# Altium PCB NixieClock.PcbDoc
Units mm, origin at the board's own origin, x right, y up, seen from the top; angles counter-clockwise.
Board outline 100 x 100 mm, 2 copper layers (Top Layer, Bottom Layer); 100 components, 82 nets, 362 pads, 0 vias.
Unrouted connection lines stored in the file: 208.
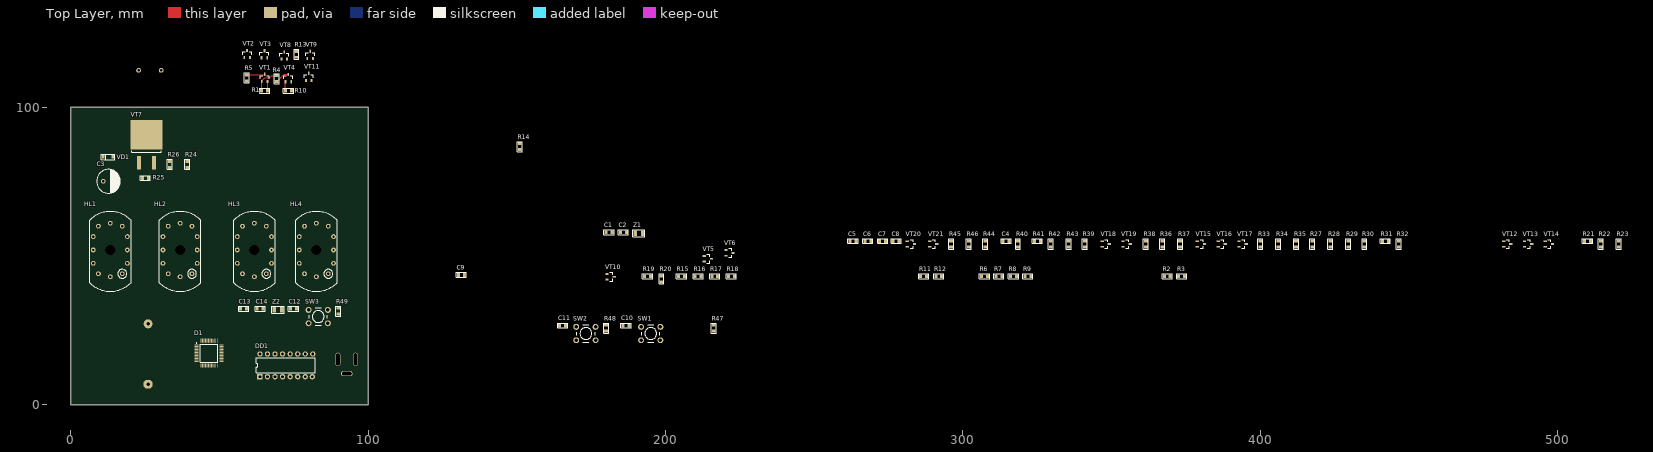
[diagram p0: Top Layer view]
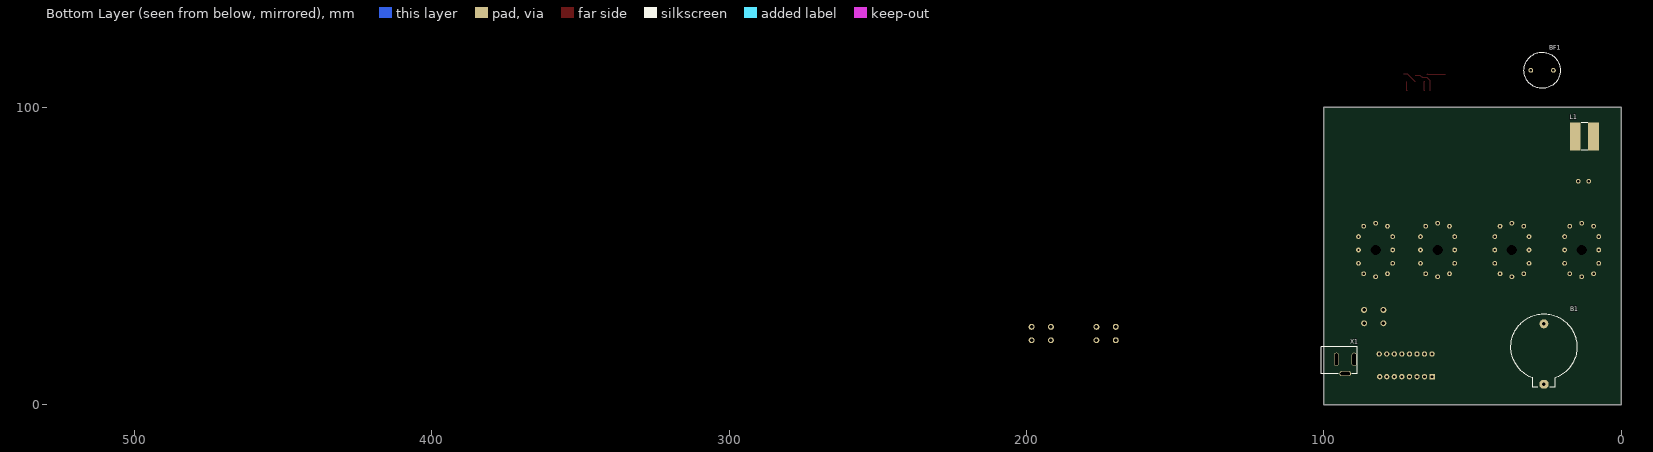
[diagram p1: Bottom Layer view, seen from below]

## Layer stack, top to bottom
Top Solder: solder mask 0.0102, Solder Resist, Dk 3.5
Top Layer: signal copper 0.0356
Dielectric 1: dielectric 0.32, FR-4, Dk 4.8
Bottom Layer: signal copper 0.0356
Bottom Solder: solder mask 0.0102, Solder Resist, Dk 3.5

## Board outline
0,0 0,100 100,100 100,0

## Design rules (kind name [scope] priority, off if disabled: settings)
Clearance [All] p1: gap=0.254 ignorepadtopadclearanceinfootprint=FALSE except(0: Arc-Hole Track-Hole SMDPad-Hole THPad-Hole Via-Hole Fill-Hole Poly-Hole Region-Hole Text-Hole)
PolygonConnect [All] p1: connectstyle=Relief reliefconductorwidth=0.254 reliefentries=4 polygonreliefangle="90 Angle" airgapwidth=0.254
RoutingVias [All] p1: holewidth=0.711 width=1.27 viastyle="Through Hole" minholewidth=0.711 minwidth=1.27 maxholewidth=0.711 maxwidth=1.27
SolderMaskExpansion [All] p1: expansion=0.102 istentingtop=FALSE
Width [All] p1: maxlimit=5 minlimit=0.254 preferedwidth=0.254 minimp=50.000000 maximp=50.000000 favimp=50.000000
30 further rules are at their usual default settings.

## Classes and differential pairs
component class NixieClock: B1 BF1 C1 C2 C3 C4 C5 C6 C7 C8 C9 C10 C11 C12 C13 C14 D1 DD1 HL1 HL2 HL3 HL4 L1 R21 R22 R23 R24 R25 R26 R27 R28 R29 R30 R31 R32 R33 R34 R35 R36 R37 R38 R39 R40 R41 R42 R43 R44 R45 R46 R47 R48 R49 SW1 SW2 SW3 VD1 VT7 VT12 VT13 VT14 VT15 VT16 VT17 VT18 VT19 VT20 VT21 X1 Z1 Z2
component class Clock: R1 R2 R3 R4 R5 R6 R7 R8 R9 R10 R11 R12 R13 R14 R15 R16 R17 R18 R19 R20 VT1 VT2 VT3 VT4 VT5 VT6 VT8 VT9 VT10 VT11

## Components (designator, comment, footprint, x,y, rotation, side; value= is the part's Value field where it differs from the comment)
B1 "Single battery CR2032" "BAT: CH224-2032" 26,17 r90 bottom
BF1 "DIP switch, 2.73 kHz, 3VDC, 80mA, -20...+70°C" "BUZ: AI-1223-TWT-3V-2-R" 26.6,112.4 r180 bottom
C1 "Ceramic capacitor, 12p, X7R, ±10%, 16V, 0805, -55...+125°C" "CAP: 0805" 180.975,57.912 r0 top value=12p
C2 "Ceramic capacitor, 12p, X7R, ±10%, 16V, 0805, -55...+125°C" "CAP: 0805" 185.801,57.912 r0 top value=12p
C3 "Aluminium capacitor, 4.7μF, 300V, ±20%, 54mOhm, 14x10x5 mm, -55...+105°C" "CAP: D8C3.5H12" 12.7,75.1 r0 top value=4.7μF
C4 "Ceramic capacitor, 0.1μF, X7R, ±10%, 16V, 0805, -55...+125°C" "CAP: 0805" 314.499,55 r0 top value=0.1μF
C5 "Ceramic capacitor, 0.1μF, X7R, ±10%, 16V, 0805, -55...+125°C" "CAP: 0805" 262.999,55 r0 top value=0.1μF
C6 "Ceramic capacitor, 0.1μF, X7R, ±10%, 16V, 0805, -55...+125°C" "CAP: 0805" 267.999,55 r0 top value=0.1μF
C7 "Ceramic capacitor, 0.1μF, X7R, ±10%, 16V, 0805, -55...+125°C" "CAP: 0805" 272.999,55 r0 top value=0.1μF
C8 "Ceramic capacitor, 0.1μF, X7R, ±10%, 16V, 0805, -55...+125°C" "CAP: 0805" 277.499,55 r0 top value=0.1μF
C9 "Ceramic capacitor, 0.1μF, X7R, ±10%, 16V, 0805, -55...+125°C" "CAP: 0805" 131.3,43.6 r0 top value=0.1μF
C10 "Ceramic capacitor, 0.1μF, X7R, ±10%, 16V, 0805, -55...+125°C" "CAP: 0805" 186.7,26.6 r0 top value=0.1μF
C11 "Ceramic capacitor, 0.1μF, X7R, ±10%, 16V, 0805, -55...+125°C" "CAP: 0805" 165.4,26.6 r0 top value=0.1μF
C12 "Ceramic capacitor, 0.1μF, X7R, ±10%, 16V, 0805, -55...+125°C" "CAP: 0805" 74.9,32.3 r0 top value=0.1μF
C13 "Ceramic capacitor, 20p, X7R, ±10%, 16V, 0805, -55...+125°C" "CAP: 0805" 58.1,32.3 r0 top value=20p
C14 "Ceramic capacitor, 20p, X7R, ±10%, 16V, 0805, -55...+125°C" "CAP: 0805" 63.7,32.3 r0 top value=20p
D1 "IC microcontroller, 32-Bit, Cortex-M3, 72MHz, 64KB, 20KB, 2...3.6V, -40...+85°C, 48-LQFP" 48-LQFP 46.5,17.3 r0 top
DD1 "K155ID1" 16-DIP 66.14,13.21 r90 top
HL1 "IN-12" IN-12 13.3,52 r0 top
HL2 "IN-12" IN-12 36.75,52 r0 top
HL3 "IN-12" IN-12 61.75,52 r0 top
HL4 "IN-12" IN-12 82.6,52 r0 top
L1 "Fixed inductor, 220μH, ±10%, SDR0805, 660mA, -40...+125°C" "IND: SDR1006" 12.4,90.2 r180 bottom value=220μH
R1 "Resistor film, 10k, ±5%, 0805, 0.125W, -55...+125°C" "RES: 0805" 65.2,105.6 r0 top value=10k
R2 "Resistor film, 10k, ±5%, 0805, 0.125W, -55...+125°C" "RES: 0805" 368.681,43.18 r0 top value=10k
R3 "Resistor film, 10k, ±5%, 0805, 0.125W, -55...+125°C" "RES: 0805" 373.507,43.18 r0 top value=10k
R4 "Resistor film, 300k, ±5%, 0805, 0.125W, -55...+125°C" "RES: 0805" 69.2,109.6 r90 top value=300k
R5 "Resistor film, 10k, ±5%, 0805, 0.125W, -55...+125°C" "RES: 0805" 59.2,109.85 r90 top value=10k
R6 "Resistor film, 300k, ±5%, 0805, 0.125W, -55...+125°C" "RES: 0805" 307.213,43.18 r0 top value=300k
R7 "Resistor film, 10k, ±5%, 0805, 0.125W, -55...+125°C" "RES: 0805" 312.039,43.18 r0 top value=10k
R8 "Resistor film, 300k, ±5%, 0805, 0.125W, -55...+125°C" "RES: 0805" 316.992,43.18 r0 top value=300k
R9 "Resistor film, 10k, ±5%, 0805, 0.125W, -55...+125°C" "RES: 0805" 321.818,43.18 r0 top value=10k
R10 "Resistor film, 10k, ±5%, 0805, 0.125W, -55...+125°C" "RES: 0805" 73.2,105.6 r180 top value=10k
R11 "Resistor film, 10k, ±5%, 0805, 0.125W, -55...+125°C" "RES: 0805" 286.766,43.18 r0 top value=10k
R12 "Resistor film, 10k, ±5%, 0805, 0.125W, -55...+125°C" "RES: 0805" 291.846,43.18 r0 top value=10k
R13 "Resistor film, 10k, ±5%, 0805, 0.125W, -55...+125°C" "RES: 0805" 75.9,117.8 r90 top value=10k
R14 "Resistor film, 10k, ±5%, 0805, 0.125W, -55...+125°C" "RES: 0805" 151,86.75 r90 top value=10k
R15 "Resistor film, 300k, ±5%, 0805, 0.125W, -55...+125°C" "RES: 0805" 205.359,43.18 r0 top value=300k
R16 "Resistor film, 10k, ±5%, 0805, 0.125W, -55...+125°C" "RES: 0805" 210.947,43.18 r0 top value=10k
R17 "Resistor film, 300k, ±5%, 0805, 0.125W, -55...+125°C" "RES: 0805" 216.535,43.18 r0 top value=300k
R18 "Resistor film, 10k, ±5%, 0805, 0.125W, -55...+125°C" "RES: 0805" 222.123,43.18 r0 top value=10k
R19 "Resistor film, 10k, ±5%, 0805, 0.125W, -55...+125°C" "RES: 0805" 193.929,43.18 r0 top value=10k
R20 "Resistor film, 10k, ±5%, 0805, 0.125W, -55...+125°C" "RES: 0805" 198.628,42.291 r90 top value=10k
R21 "Resistor film, 10k, ±5%, 0805, 0.125W, -55...+125°C" "RES: 0805" 509.999,55 r0 top value=10k
R22 "Resistor film, 10k, ±5%, 0805, 0.125W, -55...+125°C" "RES: 0805" 514.499,54 r90 top value=10k
R23 "Resistor film, 10k, ±5%, 0805, 0.125W, -55...+125°C" "RES: 0805" 520.499,54 r90 top value=10k
R24 "Resistor film, 10k, ±5%, 0805, 0.125W, -55...+125°C" "RES: 0805" 39.2,80.8 r90 top value=10k
R25 "Resistor film, 500k, ±5%, 0805, 0.125W, -55...+125°C" "RES: 0805" 25.1,76.2 r0 top value=500k
R26 "Resistor film, 10k, ±5%, 0805, 0.125W, -55...+125°C" "RES: 0805" 33.3,80.8 r90 top value=10k
R27 "Resistor film, 300k, ±5%, 0805, 0.125W, -55...+125°C" "RES: 0805" 417.499,54 r90 top value=300k
R28 "Resistor film, 10k, ±5%, 0805, 0.125W, -55...+125°C" "RES: 0805" 423.499,54 r90 top value=10k
R29 "Resistor film, 300k, ±5%, 0805, 0.125W, -55...+125°C" "RES: 0805" 429.499,54 r90 top value=300k
R30 "Resistor film, 10k, ±5%, 0805, 0.125W, -55...+125°C" "RES: 0805" 434.999,54 r90 top value=10k
R31 "Resistor film, 300k, ±5%, 0805, 0.125W, -55...+125°C" "RES: 0805" 441.999,55 r0 top value=300k
R32 "Resistor film, 10k, ±5%, 0805, 0.125W, -55...+125°C" "RES: 0805" 446.499,54 r90 top value=10k
R33 "Resistor film, 10k, ±5%, 0805, 0.125W, -55...+125°C" "RES: 0805" 399.999,54 r90 top value=10k
R34 "Resistor film, 10k, ±5%, 0805, 0.125W, -55...+125°C" "RES: 0805" 405.999,54 r90 top value=10k
R35 "Resistor film, 10k, ±5%, 0805, 0.125W, -55...+125°C" "RES: 0805" 411.999,54 r90 top value=10k
R36 "Resistor film, 10k, ±5%, 0805, 0.125W, -55...+125°C" "RES: 0805" 366.999,54 r90 top value=10k
R37 "Resistor film, 10k, ±5%, 0805, 0.125W, -55...+125°C" "RES: 0805" 372.999,54 r90 top value=10k
R38 "Resistor film, 10k, ±5%, 0805, 0.125W, -55...+125°C" "RES: 0805" 361.499,54 r90 top value=10k
R39 "Resistor film, 10k, ±5%, 0805, 0.125W, -55...+125°C" "RES: 0805" 340.999,54 r90 top value=10k
R40 "Resistor film, 300k, ±5%, 0805, 0.125W, -55...+125°C" "RES: 0805" 318.499,54 r90 top value=300k
R41 "Resistor film, 10k, ±5%, 0805, 0.125W, -55...+125°C" "RES: 0805" 324.999,55 r0 top value=10k
R42 "Resistor film, 300k, ±5%, 0805, 0.125W, -55...+125°C" "RES: 0805" 329.499,54 r90 top value=300k
R43 "Resistor film, 10k, ±5%, 0805, 0.125W, -55...+125°C" "RES: 0805" 335.499,54 r90 top value=10k
R44 "Resistor film, 0, ±5%, 0805, 0.125W, -55...+125°C" "RES: 0805" 307.499,54 r90 top value=0
R45 "Resistor film, 10k, ±5%, 0805, 0.125W, -55...+125°C" "RES: 0805" 295.999,54 r90 top value=10k
R46 "Resistor film, 10k, ±5%, 0805, 0.125W, -55...+125°C" "RES: 0805" 301.999,54 r90 top value=10k
R47 "Resistor film, 10k, ±5%, 0805, 0.125W, -55...+125°C" "RES: 0805" 216.2,25.7 r90 top value=10k
R48 "Resistor film, 10k, ±5%, 0805, 0.125W, -55...+125°C" "RES: 0805" 180,25.7 r90 top value=10k
R49 "Resistor film, 10k, ±5%, 0805, 0.125W, -55...+125°C" "RES: 0805" 90,31.4 r90 top value=10k
SW1 ", 3*4*2mm" "BUT: 6x6" 195,23.9 r0 top
SW2 ", 3*4*2mm" "BUT: 6x6" 173.2,23.9 r0 top
SW3 ", 3*4*2mm" "BUT: 6x6" 83.2,29.6 r0 top
VD1 "Zener diode, 5.1V, 500mW, 0.9V, 17Ohm, SOD-123, -55...+150°C" "DIODE: SOD123" 14.2,83.3 r180 top
VT1 "PNP transistor, 45V, 100mA, 100MHz, 300mW, 0.65V, 220, SOT-23, -55...+125°C" SOT23 65.2,109.85 r90 top
VT2 "PNP transistor, 45V, 100mA, 100MHz, 300mW, 0.65V, 220, SOT-23, -55...+125°C" SOT23 59.3,117.9 r90 top
VT3 "PNP transistor, 45V, 100mA, 100MHz, 300mW, 0.65V, 220, SOT-23, -55...+125°C" SOT23 65.1,117.8 r90 top
VT4 "NPN transistor, 45V, 100mA, 100MHz, 300mW, 0.6V, 420, SOT-23, -55...+125°C" SOT23 73.15,109.8 r90 top
VT5 "NPN transistor, 45V, 100mA, 100MHz, 300mW, 0.6V, 420, SOT-23, -55...+125°C" SOT23 214.2,49.05 r0 top
VT6 "NPN transistor, 45V, 100mA, 100MHz, 300mW, 0.6V, 420, SOT-23, -55...+125°C" SOT23 221.5,51 r0 top
VT7 "MOSFET N-channel transistor, 80V, 7A, 9.1nC, 2.5W, 34mOhm, 756pF, 8-TDSON, -55...+150°C" D2PAK 25.5,79.8 r90 top
VT8 "PNP transistor, 45V, 100mA, 100MHz, 300mW, 0.65V, 220, SOT-23, -55...+125°C" SOT23 71.8,117.4 r90 top
VT9 "PNP transistor, 45V, 100mA, 100MHz, 300mW, 0.65V, 220, SOT-23, -55...+125°C" SOT23 80.5,117.6 r90 top
VT10 "NPN transistor, 45V, 100mA, 100MHz, 300mW, 0.6V, 420, SOT-23, -55...+125°C" SOT23 181.5,43 r0 top
VT11 "NPN transistor, 45V, 100mA, 100MHz, 300mW, 0.6V, 420, SOT-23, -55...+125°C" SOT23 80,110.2 r90 top
VT12 "PNP transistor, 45V, 100mA, 100MHz, 300mW, 0.65V, 220, SOT-23, -55...+125°C" SOT23 482.999,54 r0 top
VT13 "PNP transistor, 45V, 100mA, 100MHz, 300mW, 0.65V, 220, SOT-23, -55...+125°C" SOT23 489.999,54 r0 top
VT14 "PNP transistor, 45V, 100mA, 100MHz, 300mW, 0.65V, 220, SOT-23, -55...+125°C" SOT23 496.999,54 r0 top
VT15 "NPN transistor, 45V, 100mA, 100MHz, 300mW, 0.6V, 420, SOT-23, -55...+125°C" SOT23 379.999,54 r0 top
VT16 "NPN transistor, 45V, 100mA, 100MHz, 300mW, 0.6V, 420, SOT-23, -55...+125°C" SOT23 386.999,54 r0 top
VT17 "NPN transistor, 45V, 100mA, 100MHz, 300mW, 0.6V, 420, SOT-23, -55...+125°C" SOT23 393.999,54 r0 top
VT18 "PNP transistor, 45V, 100mA, 100MHz, 300mW, 0.65V, 220, SOT-23, -55...+125°C" SOT23 347.999,54 r0 top
VT19 "PNP transistor, 45V, 100mA, 100MHz, 300mW, 0.65V, 220, SOT-23, -55...+125°C" SOT23 354.999,54 r0 top
VT20 "NPN transistor, 45V, 100mA, 100MHz, 300mW, 0.6V, 420, SOT-23, -55...+125°C" SOT23 282.499,54 r0 top
VT21 "NPN transistor, 45V, 100mA, 100MHz, 300mW, 0.6V, 420, SOT-23, -55...+125°C" SOT23 289.999,54 r0 top
X1 "KLS1-DC-005A" KLS1-DC-005A-2.0 92.8,10.4 r180 bottom
Z1 "Crystal, 32.768kHz, 12.5pF, ±20ppm, case 3215, -40...+85°C" "OSC: 3215" 191.008,57.658 r0 top
Z2 "Crystal, 8 MHz, 12.5pF, ±20ppm, case 3215, -40...+85°C" "OSC: 3215" 69.7,31.9 r0 top

## Footprints (in the part's own frame and the unit in brackets; to place one, negate y for a bottom-side part, rotate by r counter-clockwise, add the part's x,y. Pads: shape width x height; smd on the part's side, far side on the other; paste and mask are expansions set on the pad)
16-DIP [mm] "pitch 2.54 mm"
  rect 1.8x1.8 hole 0.9: 1(-3.81,2.54)
  round 1.8 hole 0.9: 2(-3.81,0) 3(-3.81,-2.54) 4(-3.81,-5.08) 5(-3.81,-7.62) 6(-3.81,-10.16) 7(-3.81,-12.7) 8(-3.837,-15.081) 9(3.81,-15.24) 10(3.81,-12.7) 11(3.81,-10.16) 12(3.81,-7.62) 13(3.81,-5.08) 14(3.81,-2.54) 15(3.81,0) 16(3.81,2.54)
  round 0.7 on Mech1: 5(-3.4,3.4)
  round 0.7 on Top Overlay: ""(-3.81,4)
  silkscreen extent -2.5,-16.07 2.5,3.82, body extent -3.94,-17.14 3.94,4.44, height 4.19
48-LQFP [mm] "QFP, 48-Leads, Body 7x7mm, Pitch 0.5mm, IPC Medium Density"
  oval 1.4x0.3 smd: 1(-4.2,2.75) 2(-4.2,2.25) 3(-4.2,1.75) 4(-4.2,1.25) 5(-4.2,0.75) 6(-4.2,0.25) 7(-4.2,-0.25) 8(-4.2,-0.75) 9(-4.2,-1.25) 10(-4.2,-1.75) 11(-4.2,-2.25) 12(-4.2,-2.75) 25(4.2,-2.75) 26(4.2,-2.25) 27(4.2,-1.75) 28(4.2,-1.25) 29(4.2,-0.75) 30(4.2,-0.25) 31(4.2,0.25) 32(4.2,0.75) 33(4.2,1.25) 34(4.2,1.75) 35(4.2,2.25) 36(4.2,2.75)
  oval 0.3x1.4 smd: 13(-2.75,-4.2) 14(-2.25,-4.2) 15(-1.75,-4.2) 16(-1.25,-4.2) 17(-0.75,-4.2) 18(-0.25,-4.2) 19(0.25,-4.2) 20(0.75,-4.2) 21(1.25,-4.2) 22(1.75,-4.2) 23(2.25,-4.2) 24(2.75,-4.2) 37(2.75,4.2) 38(2.25,4.2) 39(1.75,4.2) 40(1.25,4.2) 41(0.75,4.2) 42(0.25,4.2) 43(-0.25,4.2) 44(-0.75,4.2) 45(-1.25,4.2) 46(-1.75,4.2) 47(-2.25,4.2) 48(-2.75,4.2)
  round 0.5 on Mech1: ""(-4,4)
  silkscreen extent -4.32,-3 3,3.52, body extent -4.5,-4.5 4.5,4.5, height 1.6
"BAT: CH224-2032" [mm] "ï¿½ï¿½ï¿½ï¿½ï¿½ï¿½ï¿½ï¿½ï¿½ï¿½ ï¿½ï¿½ï¿½ï¿½ï¿½ ï¿½ï¿½ï¿½ ï¿½ï¿½ï¿½ï¿½ï¿½ï¿½ï¿½ï¿½ 2032"
  oct 3x3 hole 1.2: 1(-10.151,0)
  round 3 hole 1.2: 2(10.152,0)
  silkscreen extent -11.1,-11.1 13.52,11.1, body extent -11.08,-11 13.42,11, height 8.5
"BUT: 6x6" [mm] "Leaded Tactile Button 6x6"
  round 2 hole 1.2: 1(-3.25,2.25) 1(3.25,2.25) 2(-3.25,-2.25) 2(3.25,-2.25)
  silkscreen extent -3,-2.99 3.1,3.01, body extent -3.15,-2.96 3.25,3.04, height 4.5
"BUZ: AI-1223-TWT-3V-2-R" [mm]
  round 1.6 hole 0.8: 1(-3.8,0) 2(3.8,0)
  round 0.5 on Bottom Overlay: ""(-6.7,0)
  round 0.5 on Mech1: ""(-5.4,0)
  silkscreen extent -6.1,-6.1 6.1,6.1, body extent -5.99,-6 5.99,6, height 7.55
"CAP: 0805" [mm]
  rect 1x1.25 smd: 1(-1,0) 2(1,0)
  silkscreen extent -1.7,-0.82 1.7,0.82, body extent -1,-0.62 1,0.63, height 0.78
"CAP: D8C3.5H12" [mm]
  oct 1.6x1.6 hole 0.8: 1(-1.75,0)
  round 1.6 hole 0.8: 2(1.75,0)
  silkscreen extent -4,-4 4,4, body extent -4.25,-4.25 4.25,4.25, height 13
D2PAK [mm]
  rect 4.5x1.3 smd: 1(1.5,2.5) 3(1.5,-2.5)
  rect 9.9x10.7 smd: 2(11,0)
  round 0.5 on Mech1: ""(0.5,4.5)
  silkscreen extent 5,-5 5.5,5, body extent 0,-5.08 15.26,5.08, height 4.88
"DIODE: SOD123" [mm]
  rect 0.91x1.22 smd: 1(0,0) 2(3.275,0)
  silkscreen extent -0.65,-0.9 3.93,0.9, body extent -0.25,-0.8 3.45,0.8, height 1.25
IN-12 [mm]
  oct 1.524x1.524 hole 3.5: 1(0,0)
  round 1.6 hole 0.8: 1(4,-8) 2(5.75,-4.5) 3(5.75,0) 4(5.75,4.5) 5(4,8) 6(0,9) 7(-4,8) 8(-5.75,4.5) 9(-5.75,0) 10(-5.75,-4.5) 11(-4,-8) 12(0,-9)
  round 0.5 on Mech1: ""(-5.1,-4.5)
  silkscreen extent -7,-13.9 7,12.9, body extent -9,-13.96 9,13.96, height 25.8
"IND: SDR1006" [mm]
  rect 3.6x9.4 smd: 1(-3.1,0) 2(3.1,0)
  silkscreen extent -1.1,-4.6 1.1,4.6, body extent -4.9,-4.9 4.9,4.9, height 5.8
KLS1-DC-005A-2.0 [mm]
  oval 1.7x4.5 hole 1.2 slot 4 at 90 deg: 1(3,4.8) 2(-3,4.8)
  oval 4x1.7 hole 1.2 slot 3.2 at 0 deg: 3(0,0)
  silkscreen extent -8,0 4,9, body extent -10.74,-0.15 3.76,9.3, height 11
"OSC: 3215" [mm]
  rect 1.1x1.8 smd: 1(-1.25,0) 2(1.25,0)
  silkscreen extent -2.05,-1.15 2.05,1.15, body extent -1.61,-0.76 1.61,0.76, height 0.91
"RES: 0805" [mm]
  rect 1x1.25 smd: 1(-1,0) 2(1,0)
  silkscreen extent -1.7,-0.82 1.7,0.82, body extent -1,-0.6 1,0.6, height 0.44
SOT23 [mm]
  rect 1.1x0.6 smd: 1(-1.2,0.95) 2(-1.2,-0.95) 3(1.2,0)
  round 0.5 on Mech1: ""(-0.9,1.1)
  silkscreen extent -0.3,-1.5 0.7,1.5, body extent -1.32,-1.52 1.32,1.52, height 1.12

## Part data
B1: library part Connector_CH224-2032, Manufacturer=KLS, PartNumber=CH224-2032, CommentText=CR2032, HelpURL=https://www.chipdip.ru/product/bh-642, TypeConnector="Single battery CR2032", ValueManufacturerPartNumber="Single battery CR2032"
BF1: library part Buzzer, CurrentMax=80mA, Frequency="2.73 kHz", Manufacturer="PUI Audio", PartNumber=AT-0927-TT-6-R, Temperature=-20...+70°C, VoltageMax=3VDC, HelpURL=https://www.digikey.com/products/en?keywords=AT-0927-TT-6-R, TypeBuzzer="DIP switch", ValueManufacturerPartNumber="DIP switch, 2.73 kHz, 3VDC, 80mA, -20...+70°C"
C1 C2 C4 C5 C6 C7 C8 C9 C10 C11 C12 C13 C14: library part Ceramic_0805, Manufacturer=Yageo, Package=0805, PartNumber=CC0805KRX7R7BB104, Temperature=-55...+125°C, Tolerance=±10%, TypeCapacitor="Ceramic capacitor", TypeDielectric=X7R, Voltage=16V, HelpURL=https://www.digikey.com/product-detail/en/yageo/CC0805KRX7R7BB104/311-1142-1-ND/303052
  C1 C2: ValueManufacturerPartNumber="Ceramic capacitor, 12p, X7R, ±10%, 16V, 0805, -55...+125°C"
  C4 C5 C6 C7 C8 C9 C10 C11 C12: ValueManufacturerPartNumber="Ceramic capacitor, 0.1μF, X7R, ±10%, 16V, 0805, -55...+125°C"
  C13 C14: ValueManufacturerPartNumber="Ceramic capacitor, 20p, X7R, ±10%, 16V, 0805, -55...+125°C"
C3: library part Aluminium, Manufacturer=Wurth, Package="14x10x5 mm", PartNumber=860080475013, Temperature=-55...+105°C, Tolerance=±20%, TypeCapacitor="Aluminium capacitor", Voltage=300V, HelpURL=https://www.digikey.com/product-detail/en/wurth-electronics-inc/860080475013/732-9029-1-ND/5728972, Impedance=54mOhm, ValueManufacturerPartNumber="Aluminium capacitor, 4.7μF, 300V, ±20%, 54mOhm, 14x10x5 mm, -55...+105°C"
D1: library part STM32F103C8T6, "Cortex-M3", Manufacturer=STMicroelectronics, Package=48-LQFP, Temperature=-40...+85°C, ComponentType="IC microcontroller", CoreProcessor=Cortex-M3, CoreSize=32-Bit, HelpURL=https://www.digikey.com/product-detail/en/stmicroelectronics/STM32F103C8T6TR/497-17666-1-ND/7804402, MemoryRAM=20KB, MemoryROM=64KB, PartNumber=STM32F103C8T6, Speed=72MHz, Supply=2...3.6V, ValueManufacturerPartNumber="IC microcontroller, 32-Bit, Cortex-M3, 72MHz, 64KB, 20KB, 2...3.6V, -40...+85°C, 48-LQFP"
DD1: "Двоично-десятичный дешифpатоp", Manufacturer=К155ИД1, Package=DIP16, HelpURL=https://static.chipdip.ru/lib/918/DOC005918323.pdf
HL1 HL2 HL3 HL4: "IN-12 Nixie Tube", Manufacturer=USSR, PartNumber=ИН-12, ValueManufacturerPartNumber=IN-12
L1: library part Inductor_SDR1006, Manufacturer=Bourns, MaxCurrent=660mA, Package=SDR0805, PartNumber=SDR1006-221KL, Temperature=-40...+125°C, Tolerance=±10%, TypeInductor="Fixed inductor", HelpURL=https://www.digikey.com/product-detail/en/bourns-inc/SDR1006-221KL/SDR1006-221KLCT-ND/2127211, ValueManufacturerPartNumber="Fixed inductor, 220μH, ±10%, SDR0805, 660mA, -40...+125°C"
R1 R2 R3 R4 R5 R6 R7 R8 R9 R10 R11 R12 R13 R14 R15 R16 R17 R18 R19 R20 R21 R22 R23 R24 R25 R26 R27 R28 R29 R30 R31 R32 R33 R34 R35 R36 R37 R38 R39 R40 R41 R42 R43 R44 R45 R46 R47 R48 R49: library part Resistor_0805, Manufacturer=Yageo, Package=0805, PartNumber=RC0805JR-07100RL, Power=0.125W, Temperature=-55...+125°C, Tolerance=±5%, TypeResistor="Resistor film", HelpURL=https://www.digikey.com/product-detail/en/yageo/RC0805JR-07100RL/311-100ARCT-ND/731185
  R1 R2 R3 R5 R7 R9 R10 R11 R12 R13 R14 R16 R18 R19 R20 R21 R22 R23 R24 R26 R28 R30 R32 R33 R34 R35 R36 R37 R38 R39 R41 R43 R45 R46 R47 R48 R49: ValueManufacturerPartNumber="Resistor film, 10k, ±5%, 0805, 0.125W, -55...+125°C"
  R4 R6 R8 R15 R17 R27 R29 R31 R40 R42: ValueManufacturerPartNumber="Resistor film, 300k, ±5%, 0805, 0.125W, -55...+125°C"
  R25: ValueManufacturerPartNumber="Resistor film, 500k, ±5%, 0805, 0.125W, -55...+125°C"
  R44: ValueManufacturerPartNumber="Resistor film, 0, ±5%, 0805, 0.125W, -55...+125°C"
SW1 SW2 SW3: library part Button_3x4x2_SMT, "SMT 3*4*2 2PIN", Manufacturer="xin cheng electronic", Package=3*4*2mm, PartNumber="3*4*2 2PIN", CommentText="\"Кнопка\"", HelpURL=https://aliexpress.ru/item/32309509976.html?spm=a2g0v.12010612.8148356.51.441f61b1yUlL0Q, ValueManufacturerPartNumber=", 3*4*2mm"
VD1: library part Zener_single, Current=500mW, Manufacturer="Diodes Incorporated", Package=SOD-123, PartNumber=MMSZ5231B-7-F, Temperature=-55...+150°C, Voltage=5.1V, VoltageDrop=0.9V, HelpURL=https://www.digikey.com/product-detail/en/diodes-incorporated/MMSZ5231B-7-F/MMSZ5231B-FDICT-ND/755506, RecoveryTime=17Ohm, TypeDiode="Zener diode", ValueManufacturerPartNumber="Zener diode, 5.1V, 500mW, 0.9V, 17Ohm, SOD-123, -55...+150°C"
VT1 VT2 VT3 VT8 VT9 VT12 VT13 VT14 VT18 VT19: library part BJT_PNP_123, CurrentCE=100mA, CurrentGain=220, Frequency=100MHz, Manufacturer="ON Semiconductor", MaxPower=300mW, Package=SOT-23, PartNumber=MMBTA92, Temperature=-55...+125°C, VoltageCE=45V, VoltageSaturation=0.65V, HelpURL=https://www.digikey.com/product-detail/en/on-semiconductor/BC857BLT3G/BC857BLT3GOSCT-ND/2704963, TypeTransistor="PNP transistor", ValueManufacturerPartNumber="PNP transistor, 45V, 100mA, 100MHz, 300mW, 0.65V, 220, SOT-23, -55...+125°C"
VT4 VT5 VT6 VT10 VT11 VT15 VT16 VT17 VT20 VT21: library part BJT_NPN_132, CurrentCE=100mA, CurrentGain=420, Frequency=100MHz, Manufacturer="ON Semiconductor", MaxPower=300mW, Package=SOT-23, PartNumber=MMBTA42, Temperature=-55...+125°C, VoltageCE=45V, VoltageSaturation=0.6V, HelpURL=https://www.digikey.com/product-detail/en/on-semiconductor/BC847CLT1G/BC847CLT1GOSCT-ND/917836, TypeTransistor="NPN transistor", ValueManufacturerPartNumber="NPN transistor, 45V, 100mA, 100MHz, 300mW, 0.6V, 420, SOT-23, -55...+125°C"
VT7: library part MOSFET_N_123, CurrentDS=7A, InputCapacitor=756pF, Manufacturer="Infineon Technologies", MaxPower=2.5W, Package=8-TDSON, PartNumber=IRF640, Temperature=-55...+150°C, VoltageDS=80V, GateCharge=9.1nC, HelpURL=https://www.digikey.com/product-detail/en/infineon-technologies/BSC340N08NS3GATMA1/BSC340N08NS3GATMA1TR-ND/2080655, RDS=34mOhm, TypeTransistor="MOSFET N-channel transistor", ValueManufacturerPartNumber="MOSFET N-channel transistor, 80V, 7A, 9.1nC, 2.5W, 34mOhm, 756pF, 8-TDSON, -55...+150°C"
X1: library part Connector_KLS1-DC-005A, CurrentMax=25A, Manufacturer="TE Connectivity", ValueManufacturerPartNumber="Connector, 2pin, 9.53mm, 300VAC, 25A", VoltageMax=300VAC, CommentText="\"Разъем\"", Multichannel=2pin, PartNumber=KLS1-DC-005A, Pitch=9.53mm, TypeConnector=Connector
Z1: library part Crystal_3215, Frequency=32.768kHz, LoadCapacitance=12.5pF, Manufacturer=Epson, Package="case 3215", PartNumber="FC-135 32.7680KA-A5", Temperature=-40...+85°C, Tolerance=±20ppm, HelpURL=https://www.digikey.com/product-detail/en/epson/FC-135-32.7680KA-A5/SER4103CT-ND/6188447, TypeOscilator=Crystal, ValueManufacturerPartNumber="Crystal, 32.768kHz, 12.5pF, ±20ppm, case 3215, -40...+85°C"
Z2: library part Crystal_3215, Frequency="8 MHz", LoadCapacitance=12.5pF, Manufacturer=Epson, Package="case 3215", PartNumber="FC-135 32.7680KA-A5", Temperature=-40...+85°C, Tolerance=±20ppm, HelpURL=https://www.digikey.com/product-detail/en/epson/FC-135-32.7680KA-A5/SER4103CT-ND/6188447, TypeOscilator=Crystal, ValueManufacturerPartNumber="Crystal, 8 MHz, 12.5pF, ±20ppm, case 3215, -40...+85°C"

## Nets (pads, with @x,y where several pads share a name; then routed paths per layer and width w, separated by ;. In a path a pad name is that pad's centre, name@x,y a point inside that pad or via, vN(x,y) a via of type N, cw(c..) or ccw(c..) an arc to the next point about the centre after c; other vN are vias at no path point)
+5V: C9.2 DD1.5@73.76,9.4 L1.2 X1.1
+180V: C3.1 R1.2 R2.2 R3.2 R13.2 R14.2 R21.2 R22.2 R23.2 R25.1 R36.2 R37.2 VD1.2 VT1.2 VT2.2 VT3.2 VT8.2 VT9.2 VT12.2 VT13.2 VT14.2 VT18.2 VT19.2 | length 3.1
  Top Layer w0.4: VT1.2 66.175,108.625 66.175,105.625 R1.2
A0: D1.25 DD1.3
A1: D1.26 DD1.6
A2: D1.27 DD1.7
A3: D1.28 DD1.4
BUT1: C10.2 D1.18 R47.2 SW1.1
BUT2: C11.2 D1.19 R48.2 SW2.1
BUT3: C12.2 D1.17 R49.2 SW3.1
CAT1: D1.10 R33.1
CAT2: D1.11 R45.1
CAT3: D1.12 R34.1
CAT4: D1.13 R46.1
CAT5: D1.14 R35.1
CLK: D1.40 R24.2
GND: B1.2 BF1.2 C1.1 C2.1 C3.2 C4.1 C5.1 C6.1 C7.1 C8.1 C9.1 C10.1 C11.1 C12.1 C13.1 C14.1 D1.8 D1.20 D1.23 D1.35 D1.47 DD1.12 R25.2 R26.2 R44.1 SW1.2 SW2.2 SW3.2 VT4.2 VT5.2 VT6.2 VT7.3 VT10.2 VT11.2 VT15.2 VT16.2 VT17.2 VT20.2 VT21.2 X1.2 X1.3
L1: HL1.1 R28.1
L2: R41.1
L3: HL3.1 R30.1
L4: HL4.1 R43.1
L5: R32.1
NetB1_1: B1.1 D1.1
NetC4_2: C4.2 D1.7 R39.1
NetD1_44: D1.44 R38.1 R44.2
NetDD1_1: DD1.1 HL1.4 HL2.4 HL3.4 HL4.4
NetDD1_2: DD1.2 HL1.3 HL2.3 HL3.3 HL4.3
NetDD1_8: DD1.8 HL1.10 HL2.10 HL3.10 HL4.10
NetDD1_9: DD1.9 HL1.9 HL2.9 HL3.9 HL4.9
NetDD1_10: DD1.10 HL1.5 HL2.5 HL3.5 HL4.5
NetDD1_11: DD1.11 HL1.6 HL2.6 HL3.6 HL4.6
NetDD1_13: DD1.13 HL1.8 HL2.8 HL3.8 HL4.8
NetDD1_14: DD1.14 HL1.7 HL2.7 HL3.7 HL4.7
NetDD1_15: DD1.15 HL1.11 HL2.11 HL3.11 HL4.11
NetDD1_16: DD1.16 HL1.2 HL2.2 HL3.2 HL4.2
NetL1_1: L1.1 VD1.1 VT7.2
NetR1_1: R1.1 R4.2 VT1.1 | length 9.1
  Top Layer w0.254: R4.2 R4.2@69.325,110.6
  Top Layer w0.4: R1.1 64.225,105.625 64.225,108.625 VT1.1 64.25,108.9 65.2,109.85 66.762,109.85 67.512,110.6 R4.2
NetR2_1: R2.1 R6.2 VT2.1
NetR3_1: R3.1 R8.2 VT3.1
NetR4_1: R4.1 VT4.3 | length 4.9
  Top Layer w0.4: R4.1 69.325,108.6 71.725,111 VT4.3
NetR5_2: R5.2 VT1.3 | length 6.1
  Top Layer w0.4: R5.2 59.3,110.95 65.1,110.95 VT1.3
NetR6_1: R6.1 VT5.3
NetR7_2: R7.2 VT2.3
NetR8_1: R8.1 VT6.3
NetR9_2: R9.2 VT3.3
NetR10_2: R10.2 VT4.1 | length 3.1
  Top Layer w0.4: R10.2@72.1,105.7 R10.2 VT4.1
NetR11_2: R11.2 VT5.1
NetR12_2: R12.2 VT6.1
NetR13_1: R13.1 R15.2 VT8.1
NetR14_1: R14.1 R17.2 VT9.1
NetR15_1: R15.1 VT10.3
NetR16_2: R16.2 VT8.3
NetR17_1: R17.1 VT11.3
NetR18_2: R18.2 VT9.3
NetR19_2: R19.2 VT10.1
NetR20_2: R20.2 VT11.1
NetR21_1: R21.1 R27.2 VT12.1
NetR22_1: R22.1 R29.2 VT13.1
NetR23_1: R23.1 R31.2 VT14.1
NetR24_1: R24.1 R26.1 VT7.1
NetR27_1: R27.1 VT15.3
NetR28_2: R28.2 VT12.3
NetR29_1: R29.1 VT16.3
NetR30_2: R30.2 VT13.3
NetR32_2: R32.2 VT14.3
NetR33_2: R33.2 VT15.1
NetR34_2: R34.2 VT16.1
NetR35_2: R35.2 VT17.1
NetR36_1: R36.1 R40.2 VT18.1
NetR37_1: R37.1 R42.2 VT19.1
NetR40_1: R40.1 VT20.3
NetR41_2: R41.2 VT18.3
NetR42_1: R42.1 VT21.3
NetR43_2: R43.2 VT19.3
NetR45_2: R45.2 VT20.1
NetR46_2: R46.2 VT21.1
OSC32_IN: C2.2 D1.3 Z1.2
OSC32_OUT: C1.2 D1.4 Z1.1
OSC_IN: C14.2 D1.5 Z2.2
OSC_OUT: C13.2 D1.6 Z2.1
SWCLK: D1.37
SWDIO: D1.34
VDD: C5.2 C6.2 C7.2 C8.2 D1.9 D1.24 D1.36 D1.48 R38.2 R39.2 R47.1 R48.1 R49.1
pads on no net: BF1. BF1.1 D1. D1.2 D1.15 D1.16 D1.21 D1.22 D1.29 D1.30 D1.31 D1.32 D1.33 D1.38 D1.39 D1.41 D1.42 D1.43 D1.45 D1.46 DD1. DD1.5@62.74,9.81 HL1. HL1.12 HL2. HL2.1 HL2.12 HL3. HL3.12 HL4. HL4.12 R5.1 R7.1 R9.1 R10.1 R11.1 R12.1 R16.1 R18.1 R19.1 R20.1 R31.1 VT1. VT2. VT3. VT4. VT5. VT6. VT7. VT8. VT9. VT10. VT11. VT12. VT13. VT14. VT15. VT16. VT17. VT17.3 VT18. VT19. VT20. VT21.

## Silkscreen, mask and mechanical layers (free items; w line width, h text height)
Mechanical 5:
  the board outline again, w0.1